# EAGLE board prominifinal (EAGLE 9.6.2)
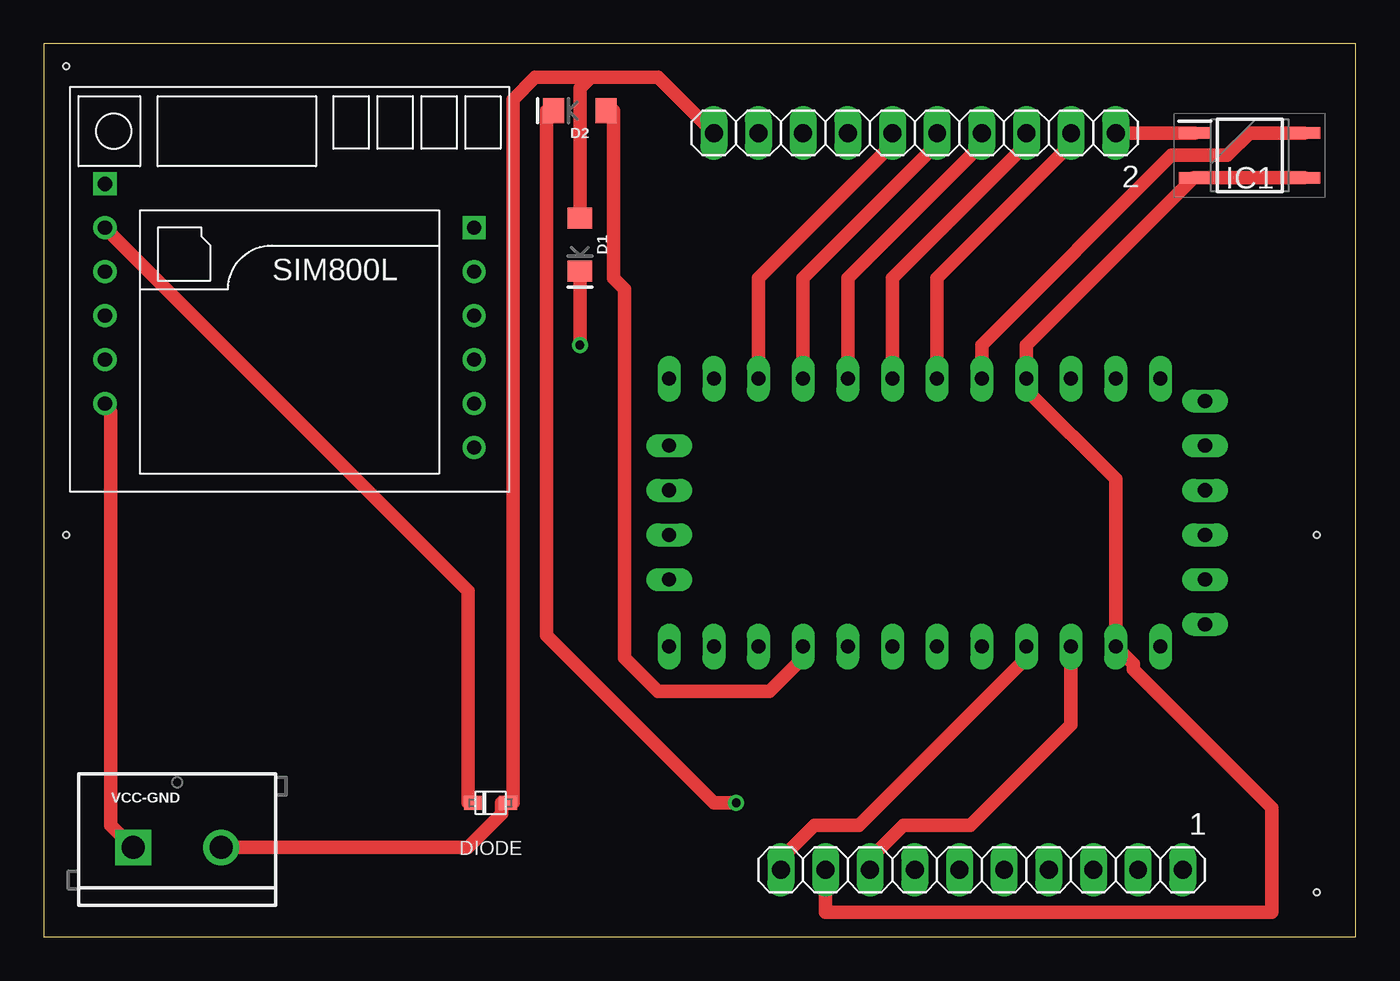
[diagram p0: board, top side]
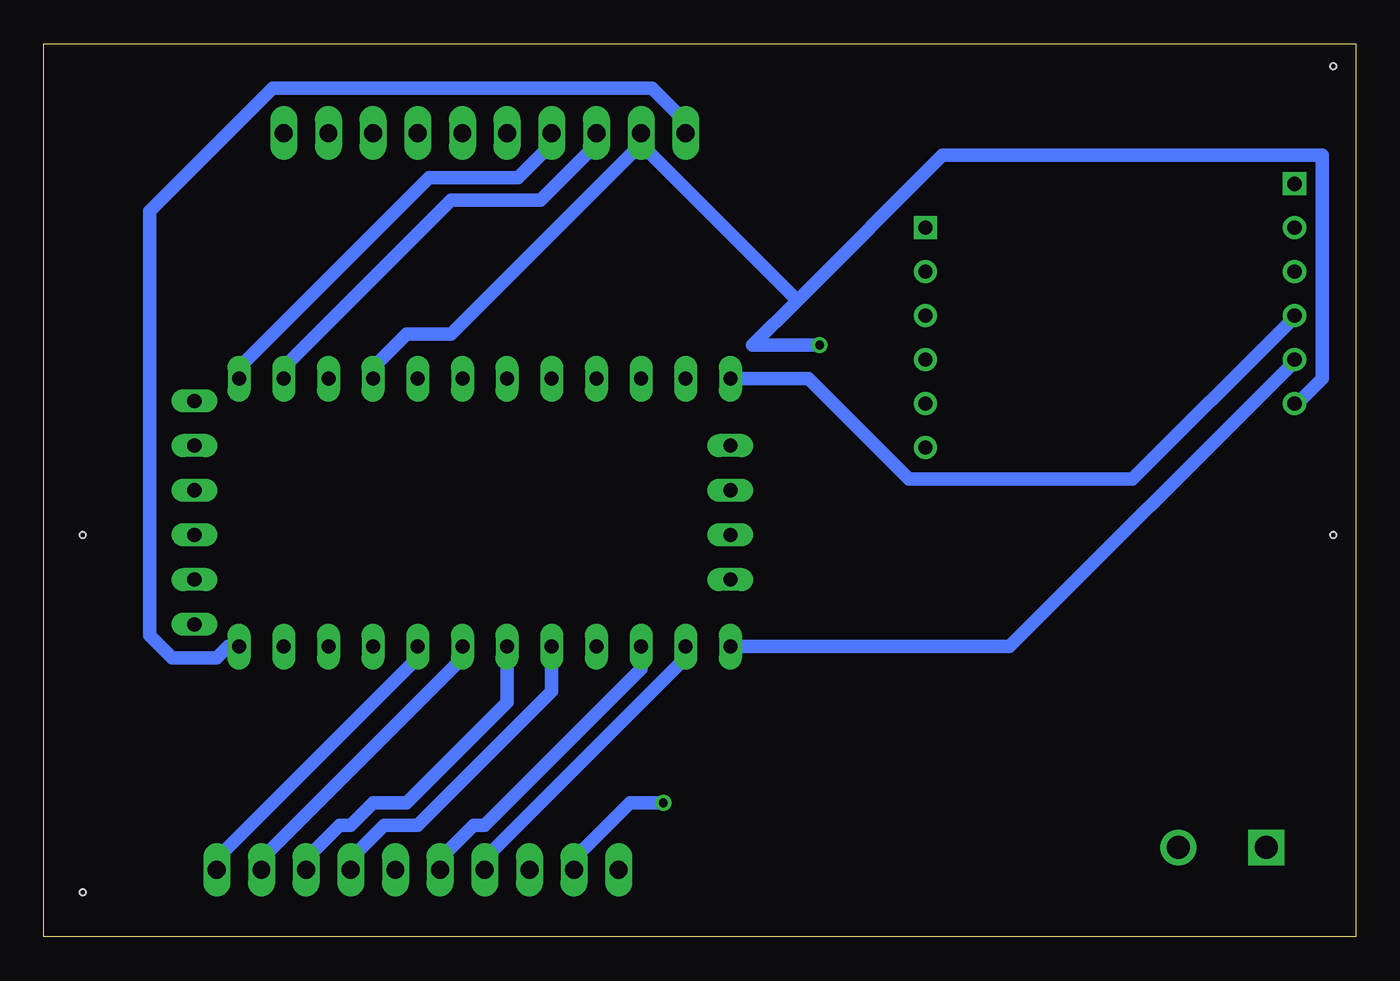
[diagram p1: board, bottom side, seen from below]

Size 74.6 x 50.79 mm. Coordinates in mm from the lower left corner, seen from the top.
Outline: 0,0 74.6,0 74.6,50.79 0,50.79 0,0
Copper layers (1*16): Top 0.035mm / dielectric 1.5mm / Bottom 0.035mm
Design rules "default *": minimum track width 30mil, minimum drill 0.35mm, track to track 20mil, track to pad 20mil, pad to pad 6mil, via to via 6mil, smd to smd 6mil, copper to edge 40mil, drill to drill 6mil, minimum pad ring 10mil, minimum via ring 8mil, stop-mask expansion 4mil, vias tented up to drill 0mil, thermal gap 10mil
Holes 0.35 mm at 1.27,22.86 72.39,22.86 72.39,2.54 1.27,49.53

## Footprints (pad centres in the part's own frame; a part is rotated, then mirrored left to right if it is on the bottom)
1X10 = drill 1.016 long: 1 -11.43,0; 2 -8.89,0; 3 -6.35,0; 4 -3.81,0; 5 -1.27,0; 6 1.27,0; 7 3.81,0; 8 6.35,0; 9 8.89,0; 10 11.43,0
LED-1206 = smd 1.2 x 1.4: A -1.5,0; C 1.5,0
SOD-323F = smd 1 x 0.8: A -1,0; C 1,0
SOP254P700X200-4N = smd 1.825 x 0.65: 1 -3.112,1.27; 2 -3.112,-1.27; 3 3.112,-1.27; 4 3.112,1.27
PRO-MINI = drill 0.8 long: A0 8.89,8.89; A1 8.89,11.43; A2 8.89,13.97; A3 8.89,16.51; A4 -2.54,-1.27; A5 0,-1.27; A6 2.54,-1.27; A7 5.08,-1.27; D2 -6.35,16.51; D3 -6.35,13.97; D4 -6.35,11.43; D5 -6.35,8.89; D6 -6.35,6.35; D7 -6.35,3.81; D8 -6.35,1.27; D9 -6.35,-1.27; D10 8.89,-1.27; D11 8.89,1.27; D12 8.89,3.81; D13 8.89,6.35; DTR 7.62,29.21; GND 8.89,24.13; GND1 -6.35,19.05; GND2 -5.08,29.21; GND3 -2.54,29.21; RAW 8.89,26.67; RST 8.89,21.59; RST1 -6.35,21.59; RX1 -6.35,24.13; RX1-1 2.54,29.21; TX0 -6.35,26.67; TX0-1 5.08,29.21; VCC 8.89,19.05; VCC1 0,29.21
SIM800LMODULE = drill 0.8: DTR 10.5,1; GND -10.5,-6.5; MIC+ 10.5,-1.5; MIC- 10.5,-4; RST -10.5,1; RX -10.5,-1.5; SPK+ 10.5,-6.5; SPK- 10.5,-9; TX -10.5,-4; VCC -10.5,3.5 | drill 0.8 square: NET -10.5,6; RING 10.5,3.5
SCREWTERMINAL-5MM-2 = drill 1.3 pad 2.032 square: 1 0,0 | drill 1.3 pad 2.032: 2 5,0

## Placement (x,y rotation side)
1  [1X10]  53.34,3.81 180 top
2  [1X10]  49.53,45.72 180 top
D1  RED  [LED-1206]  30.48,39.37 270 top
D2  RED  [LED-1206]  30.48,46.99 180 top
DIODE  [SOD-323F]  25.4,7.62 180 top
IC1  EL357N-B-TA-G  [SOP254P700X200-4N]  68.58,44.45 0 top
PROMINI  PRO-MINI  [PRO-MINI]  36.83,25.4 270 top
U$1  SIM800LMODULE  [SIM800LMODULE]  13.97,36.83 0 top
VCC-GND  [SCREWTERMINAL-5MM-2]  5.08,5.08 0 top

## Library data of the parts
1 2 = pinhead
D1 D2 = SparkFun-LED; PROD_ID: DIO-09912
DIODE = adafruit
IC1 = EL357N-B-TA-G; DESCRIPTION: Optoisolator Transistor Output 3750Vrms 1 Channel 4-SOP (2.54mm); HEIGHT: 2mm; MANUFACTURER_NAME: Everlight Elec; MANUFACTURER_PART_NUMBER: EL357N-B-TA-G
PROMINI = Arduino-clone
U$1 = SIM800LMODULE
VCC-GND = SparkFun-Retired; SF_SKU: PRT-08432

## Nets
D2,D3,D4,D5-IO0,D6-IO2,D7-IO4,D8-IO5,D9-IO9,GND,VIN: 2.6 PROMINI.D7
N$1: 2.10 D1.A DIODE.A PROMINI.RAW VCC-GND.2
N$2: 2.8 PROMINI.RX1
N$3: DIODE.C U$1.VCC
N$4: 1.10 PROMINI.VCC
N$5: IC1.4 PROMINI.D2
N$6: PROMINI.D9 U$1.RX
N$7: D2.A PROMINI.D13
N$8: 2.1 IC1.1
N$9: 2.2 PROMINI.D3
N$10: 2.3 PROMINI.D4
N$11: 2.4 PROMINI.D5
N$12: 2.5 PROMINI.D6
N$13: 1.8 PROMINI.RST
N$14: 2.7 PROMINI.TX0
N$16: 1.1 PROMINI.A3
N$17: 1.2 PROMINI.A2
N$18: 1.3 PROMINI.A1
N$19: 1.4 PROMINI.A0
N$21: 1.6 PROMINI.D12
N$22: 1.7 PROMINI.D11
N$23: PROMINI.D10 U$1.TX
N$26: 1.9 2.9 D1.C D2.C IC1.2 IC1.3 PROMINI.GND PROMINI.GND1 U$1.GND VCC-GND.1

## Tracks (layer width: path | path; a pad name or v marks a point on that pad's centre or on a via)
D2,D3,D4,D5-IO0,D6-IO2,D7-IO4,D8-IO5,D9-IO9,GND,VIN
  Top 0.762: PROMINI.D7 40.64,37.47 48.26,45.09 2.6
N$1
  Top 0.762: VCC-GND.2 24.13,5.08 26.04,6.99 26.04,7.62 DIODE.A 26.67,7.62 26.67,47.62 27.94,48.9 31.11,48.9 | D1.A 30.48,48.26 31.11,48.9 | 31.11,48.9 34.92,48.9 2.10
  Bottom 0.762: PROMINI.RAW 64.14,16.51 64.77,15.88 67.31,15.88 68.58,17.14 68.58,41.27 61.59,48.26 40.01,48.26 38.1,46.35 2.10
N$2
  Bottom 0.762: PROMINI.RX1 60.96,32.38 51.44,41.91 46.35,41.91 43.18,45.09 2.8
N$3
  Top 0.762: DIODE.C 24.13,7.62 24.13,19.68 3.81,40.01 U$1.VCC
N$4
  Top 0.762: PROMINI.VCC 55.88,15.88 46.35,6.35 43.81,6.35 41.91,4.45 1.10
N$5
  Top 0.762: IC1.4 68.58,45.72 67.31,44.45 64.14,44.45 53.34,33.66 PROMINI.D2
N$6
  Bottom 0.762: PROMINI.D9 31.11,31.75 25.4,26.04 12.7,26.04 3.81,34.92 U$1.RX
N$7
  Top 0.762: PROMINI.D13 43.18,15.88 41.27,13.97 34.92,13.97 33.02,15.88 33.02,36.83 32.38,37.47 32.38,46.99 D2.A
N$8
  Top 0.762: 2.1 IC1.1
N$9
  Top 0.762: PROMINI.D3 50.8,37.47 58.42,45.09 2.2
N$10
  Top 0.762: PROMINI.D4 48.26,37.47 55.88,45.09 2.3
N$11
  Top 0.762: PROMINI.D5 45.72,37.47 53.34,45.09 2.4
N$12
  Top 0.762: PROMINI.D6 43.18,37.47 50.8,45.09 2.5
N$13
  Top 0.762: PROMINI.RST 58.42,12.06 52.7,6.35 48.9,6.35 46.99,4.45 1.8
N$14
  Bottom 0.762: PROMINI.TX0 63.5,32.38 52.7,43.18 47.62,43.18 45.72,45.09 2.7
N$16
  Bottom 0.762: PROMINI.A3 53.34,15.88 64.77,4.45 1.1
N$17
  Bottom 0.762: PROMINI.A2 50.8,15.88 62.23,4.45 1.2
N$18
  Bottom 0.762: PROMINI.A1 48.26,13.34 53.98,7.62 55.88,7.62 57.15,6.35 57.78,6.35 59.69,4.45 1.3
N$19
  Bottom 0.762: PROMINI.A0 45.72,13.97 53.34,6.35 55.24,6.35 57.15,4.45 1.4
N$21
  Bottom 0.762: PROMINI.D12 40.64,15.24 49.53,6.35 50.16,6.35 52.07,4.45 1.6
N$22
  Bottom 0.762: PROMINI.D11 38.1,15.88 49.53,4.45 1.7
N$23
  Bottom 0.762: PROMINI.D10 19.68,16.51 3.81,32.38 U$1.TX
N$26  (via drill 0.5)
  Top 0.762: VCC-GND.1 3.81,6.35 3.81,29.84 U$1.GND | v30.48,33.66 D1.C | IC1.3 IC1.2 65.41,43.18 55.88,33.66 PROMINI.GND1 55.88,31.11 60.96,26.04 PROMINI.GND 61.96,15.51 61.96,15.22 69.85,7.32 69.85,1.4 44.45,1.4 1.9 | v39.37,7.62 38.1,7.62 28.57,17.14 28.57,46.99 D2.C
  Bottom 0.762: v30.48,33.66 34.29,33.66 31.75,36.2 | 40.64,45.09 31.75,36.2 | 40.64,45.09 51.44,34.29 53.98,34.29 55.88,32.38 PROMINI.GND1 | 40.64,45.09 2.9 | 31.75,36.2 23.5,44.45 1.91,44.45 1.91,31.75 3.17,30.48 U$1.GND | v39.37,7.62 41.27,7.62 44.45,4.45 1.9